# Altium PCB Balancing_Robot_1_2.PcbDoc (part 1 of 3)
Units mm, origin at the board's own origin, x right, y up, seen from the top; angles counter-clockwise.
Board outline 27 x 60 mm, 6 copper layers (Top Layer, Int1 (GND), Int2 (Sign), Int3 (Sign), Int4 (PWR), Bottom Layer), stack 1.571 mm thick; 139 components, 119 nets, 602 pads, 327 vias.
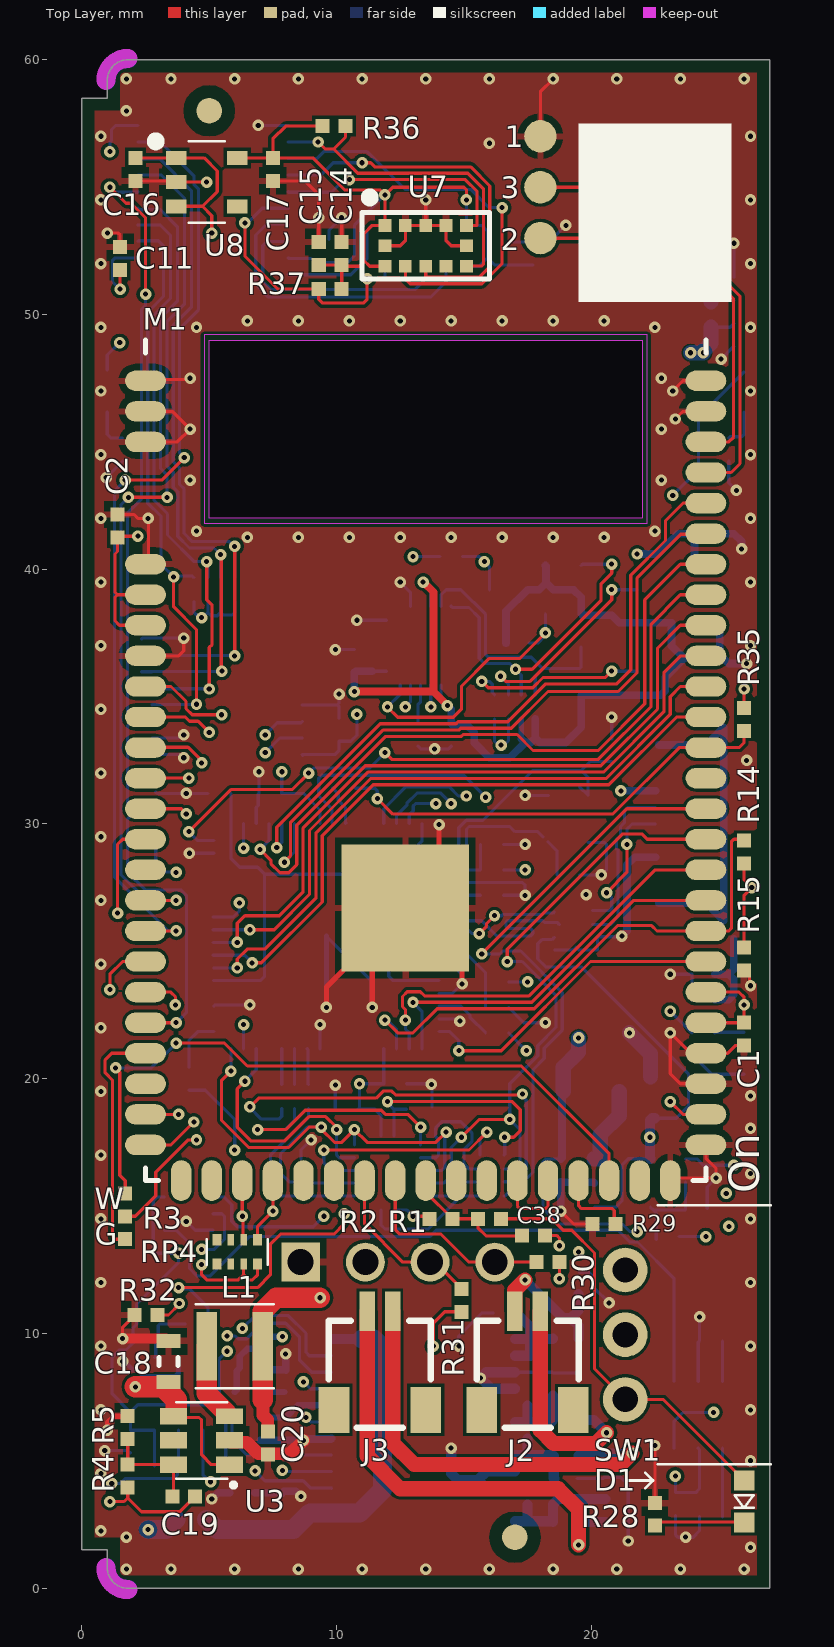
[diagram p0: Top Layer view]
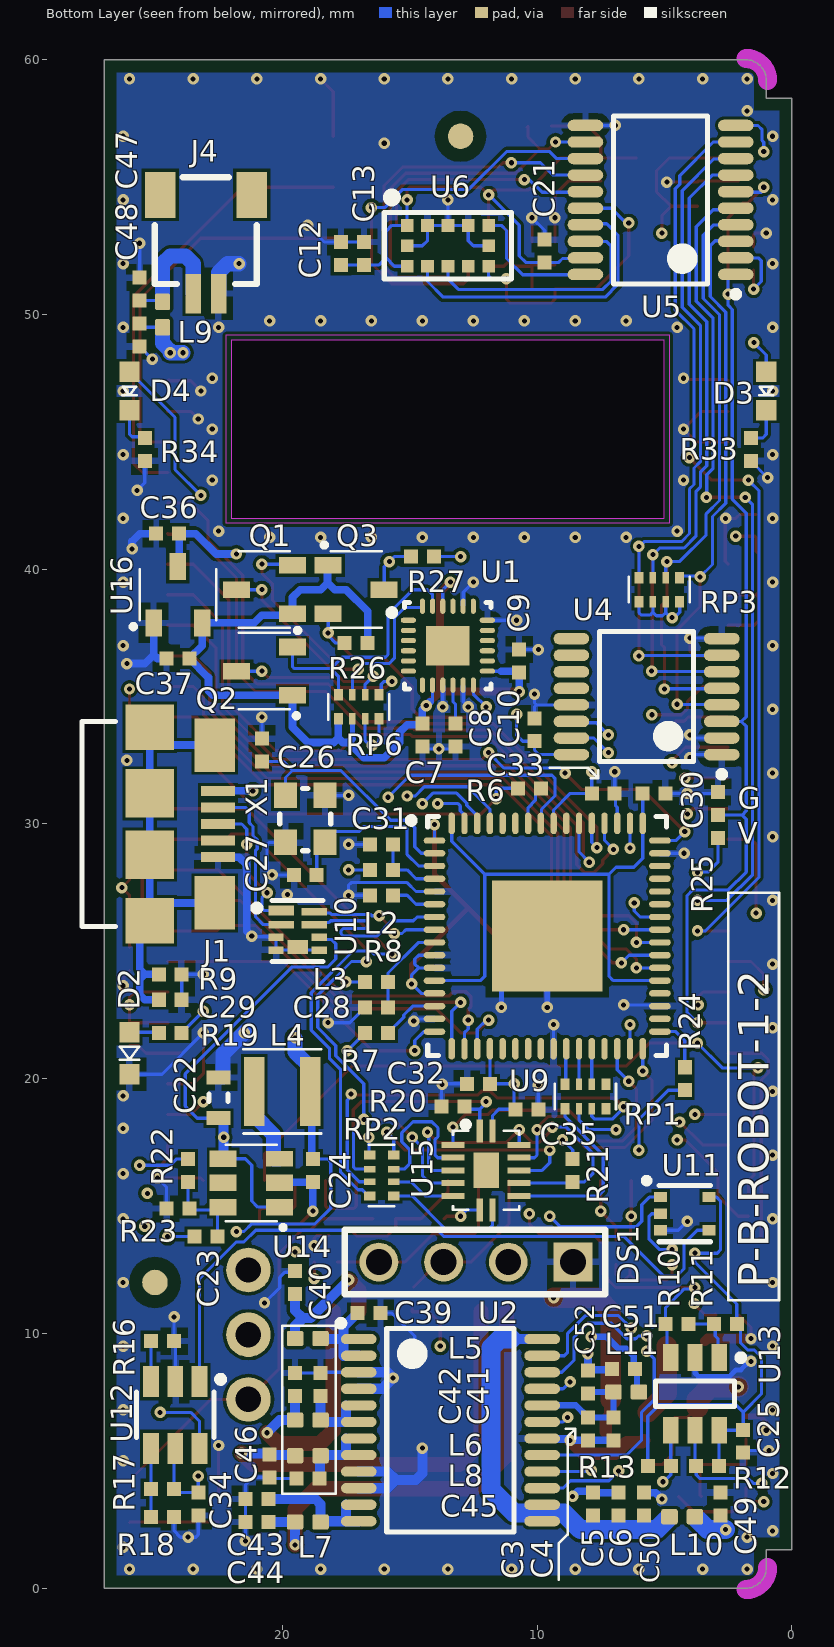
[diagram p1: Bottom Layer view, seen from below]
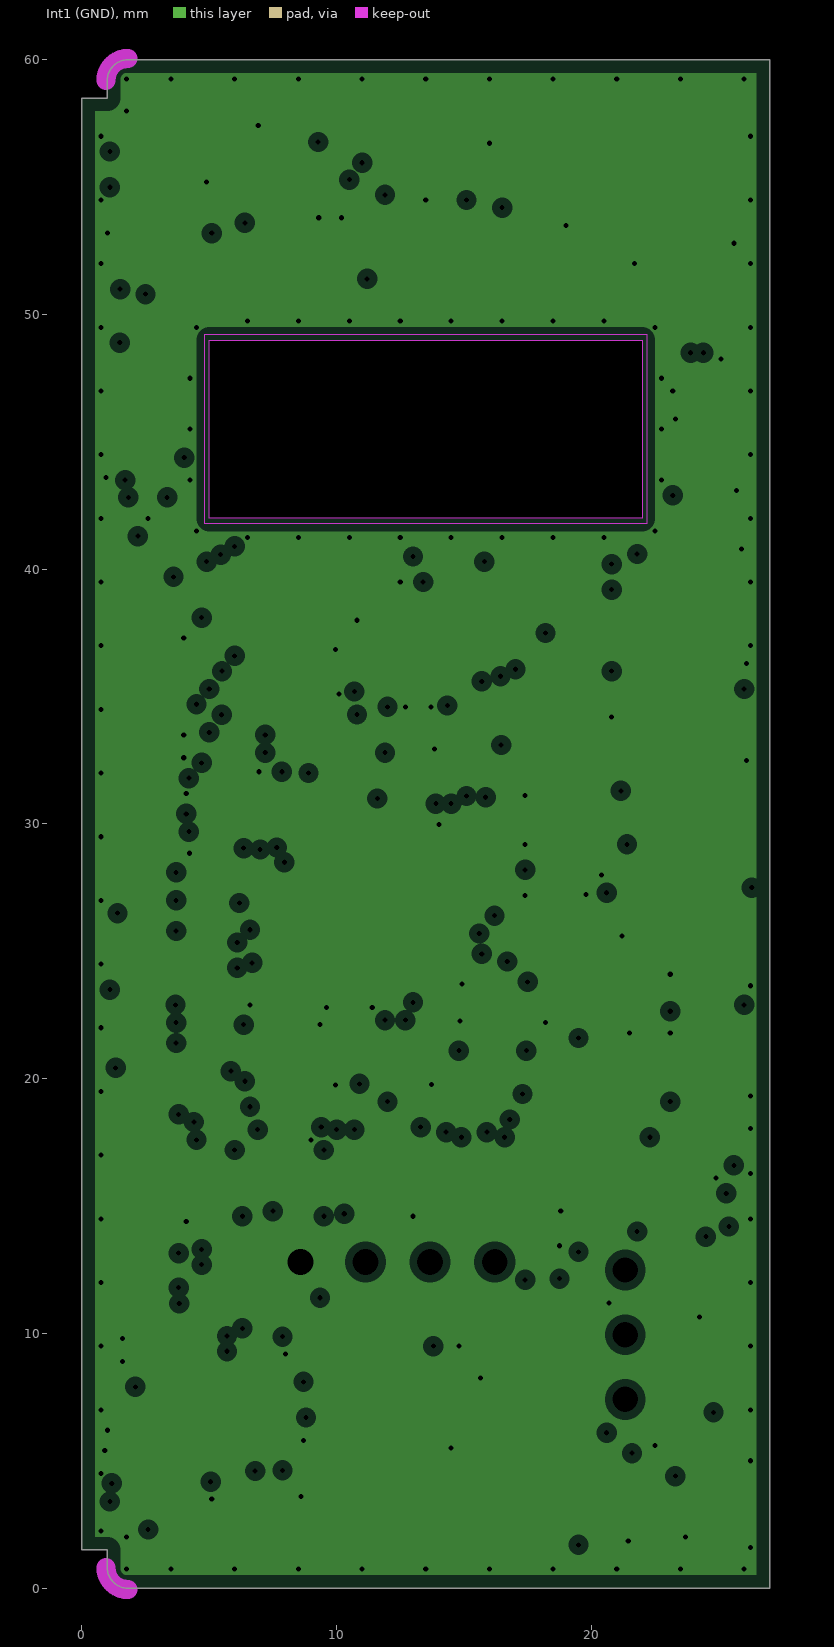
[diagram p2: Int1 (GND), clearances drawn from the general rule]
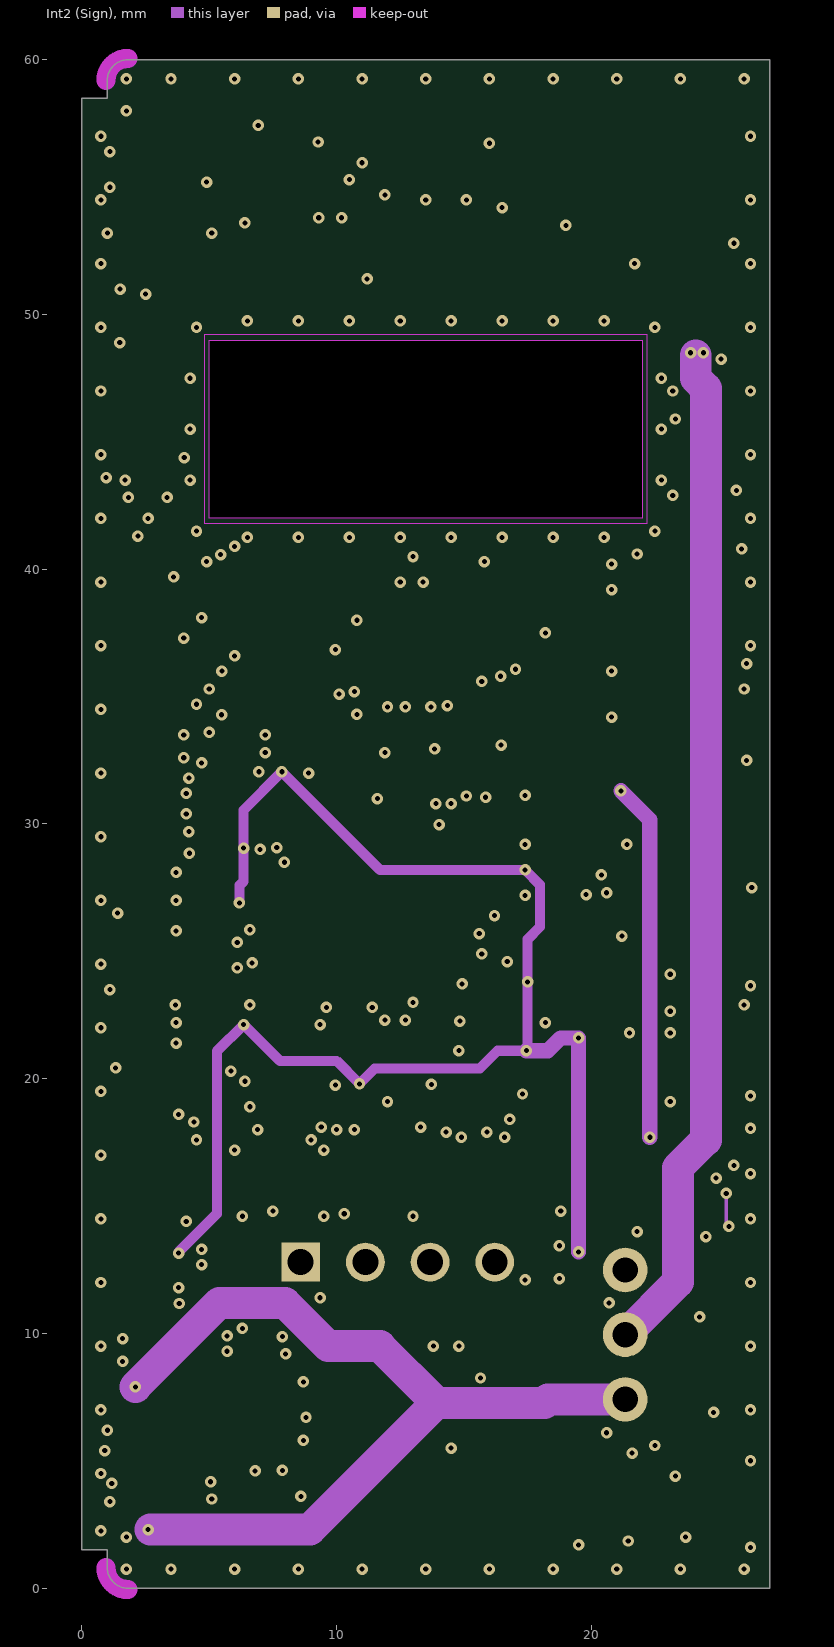
[diagram p3: Int2 (Sign)]
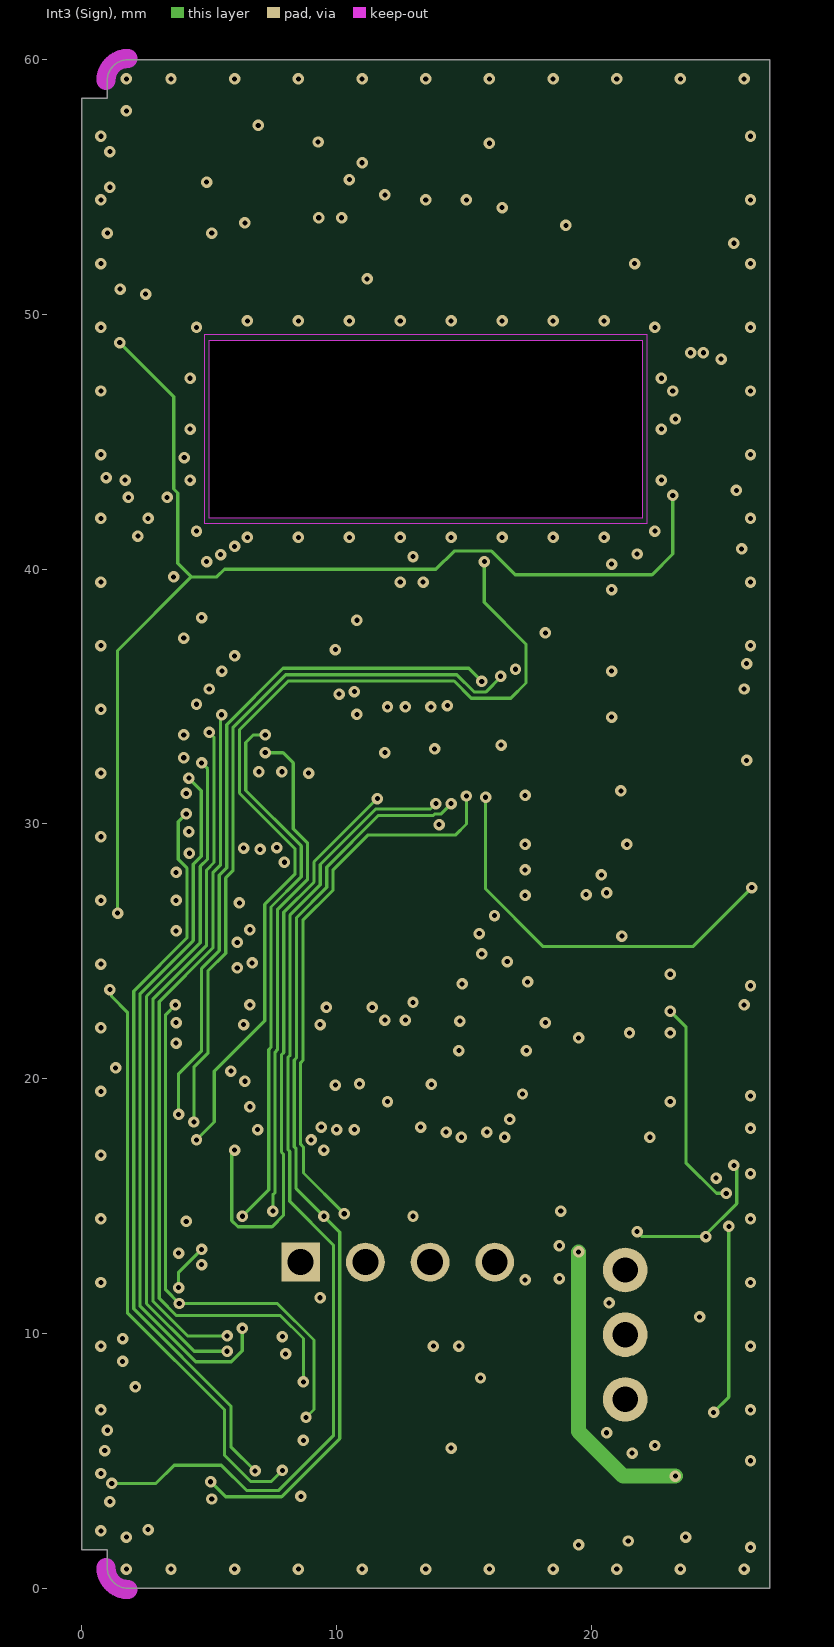
[diagram p4: Int3 (Sign)]
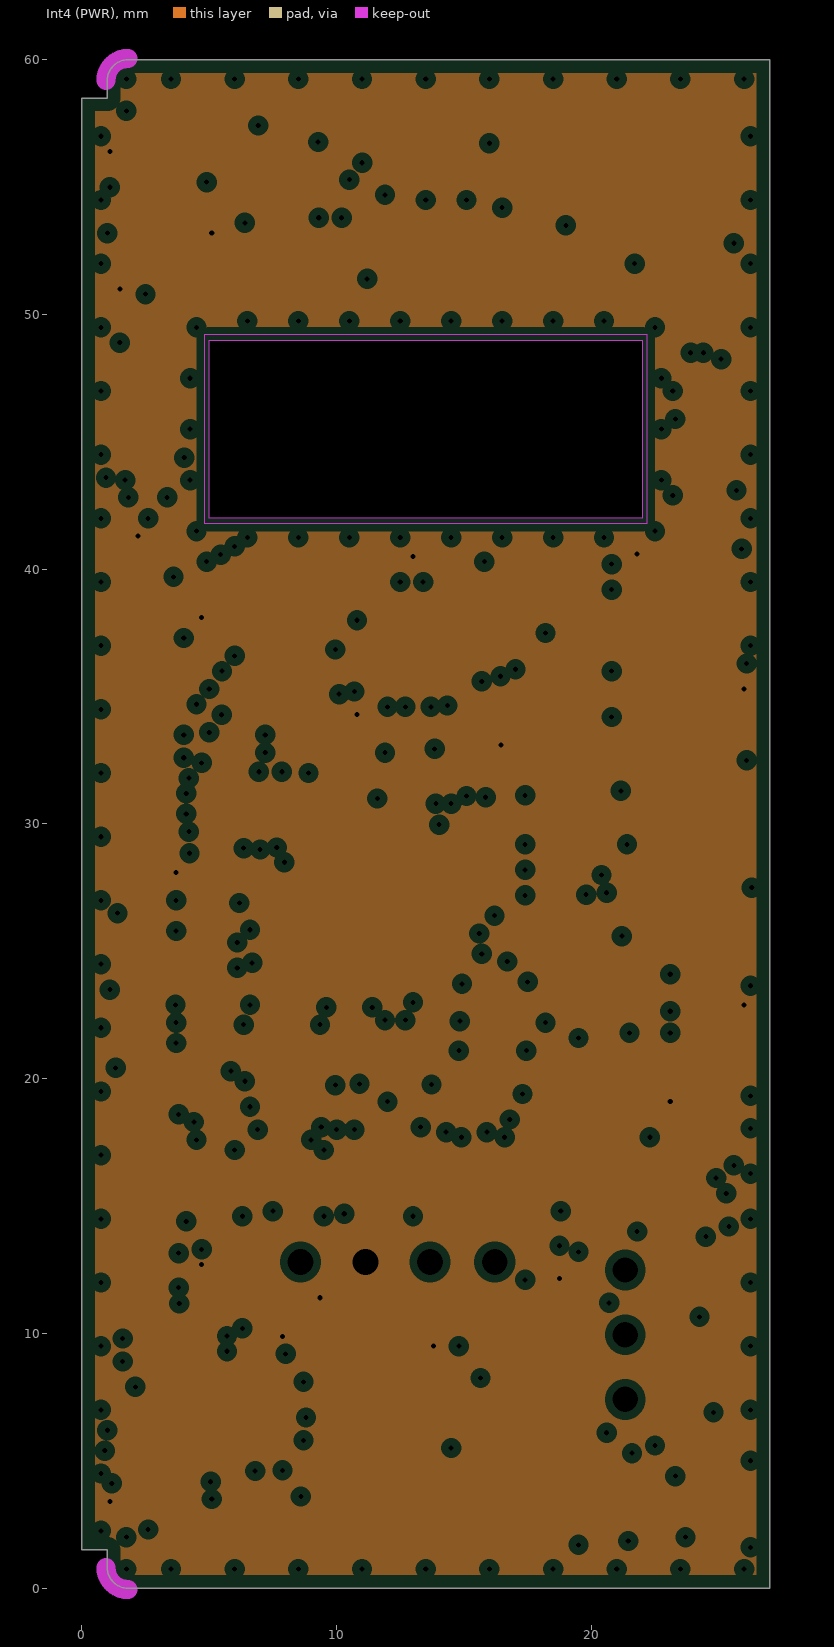
[diagram p5: Int4 (PWR), clearances drawn from the general rule]

## Layer stack, top to bottom
Top Solder: solder mask 0.0254, SM-001, Dk 4
Top Layer: signal copper 0.0044
Dielectric 1: prepreg 0.105, PP-006, Dk 4.1
Dielectric 2: prepreg 0.105, PP-006, Dk 4.1
Int1 (GND): plane copper 0.0044, net GND
Dielectric 3: core 0.4572, Core-035, Dk 4.7
Int2 (Sign): signal copper 0.0044
Dielectric 4: prepreg 0.105, PP-006, Dk 4.1
Dielectric 5: prepreg 0.105, PP-006, Dk 4.1
Int3 (Sign): signal copper 0.0044
Dielectric 6: core 0.4572, Core-035, Dk 4.7
Int4 (PWR): plane copper 0.0044, net 3V3
Dielectric 7: prepreg 0.105, PP-006, Dk 4.1
Dielectric 8: prepreg 0.105, PP-006, Dk 4.1
Bottom Layer: signal copper 0.0044
Bottom Solder: solder mask 0.0254, SM-001, Dk 4

## Board outline
0,1.5 1,1.5 1,0.8 ccw(c1.8,0.8) 1.8,0 27,0 27,60 1.8,60 ccw(c1.8,59.2) 1,59.2 1,58.5 0,58.5

## Design rules (kind name [scope] priority, off if disabled: settings)
Clearance Clearance_Fiducials [(IsPad) AND (Name = 'Free-1')] p1: gap=0.5 ignorepadtopadclearanceinfootprint=FALSE
Clearance [All] p2: gap=0.125 ignorepadtopadclearanceinfootprint=FALSE
DiffPairsRouting [All] p1: maxlimit=0.254 minlimit=0.125 mostfreqgap=0.125 toplayer_minwidth=0.125 toplayer_maxwidth=0.125 toplayer_prefwidth=0.125 midlayer1_minwidth=0.125 midlayer1_maxwidth=0.125 midlayer1_prefwidth=0.125 midlayer2_minwidth=0.125 midlayer2_maxwidth=0.125 midlayer2_prefwidth=0.125 bottomlayer_minwidth=0.125 bottomlayer_maxwidth=0.125 bottomlayer_prefwidth=0.125 maxuncoupledlength=12.7
HoleSize [All] p1: absolutevalues=TRUE maxlimit=4 minlimit=0.025 maxpercent=80.000 minpercent=20.000
MinimumSolderMaskSliver [All] p1: minsoldermaskwidth=0.01
PlaneClearance [All] p1: clearance=0.3
PlaneConnect PlaneConnect_IsVia [IsVia] p1: planeconnectstyle=Direct reliefexpansion=0.508 reliefentries=4 reliefconductorwidth=0.254 reliefairgap=0.254
PlaneConnect [All] p2: planeconnectstyle=Relief reliefexpansion=0.508 reliefentries=4 reliefconductorwidth=0.254 reliefairgap=0.254
PolygonConnect PolygonConnect_IsVia [IsVia] p1: connectstyle=Direct reliefconductorwidth=0.254 reliefentries=4 polygonreliefangle="90 Angle" airgapwidth=0.254
PolygonConnect [All] p2: connectstyle=Relief reliefconductorwidth=0.254 reliefentries=4 polygonreliefangle="90 Angle" airgapwidth=0.254
RoutingVias [All] p1: holewidth=0.2 width=0.45 viastyle="Through Hole" minholewidth=0.2 minwidth=0.45 maxholewidth=0.2 maxwidth=0.45
SilkToSilkClearance [All] p1: silktosilkclearance=0.01
SilkToSolderMaskClearance [IsPad] p1: minsilkscreentomaskgap=0.1 clearancetoexposedcopper=TRUE
SolderMaskExpansion [All] p1: expansion=0.102 istentingtop=FALSE
Width [All] p1: maxlimit=1.5 minlimit=0.125 preferedwidth=0.125
23 further rules are at their usual default settings.

## Classes and differential pairs
component class P-HEBRIDES-1-2_Sensors: C7 C8 C9 C10 C11 C12 C13 C14 C15 C16 C17 C21 C36 C37 Q1 Q2 Q3 R25 R26 R27 R36 R37 RP3 RP4 RP6 U1 U4 U5 U6 U7 U8 U16
component class P-HEBRIDES-1-2_Main: 1 2 3 C1 C2 C3 C4 C5 C6 C18 C19 C20 C38 C39 C40 C41 C42 C43 C44 C45 C46 C47 C48 C49 C50 C51 C52 D1 D3 D4 DS1 J2 J3 J4 L1 L5 L6 L7 L8 L9 L10 L11 M1 R1 R2 R3 R4 R5 R28 R29 R30 R31 R32 R33 R34 R35 SW1 U2 U3
component class P-HEBRIDES-1-2_FTDI: C22 C23 C24 C25 C26 C27 C28 C29 C30 C31 C32 C33 C34 C35 D2 J1 L2 L3 L4 R6 R7 R8 R9 R10 R11 R12 R13 R14 R15 R16 R17 R18 R19 R20 R21 R22 R23 R24 RP1 RP2 U9 U10 U11 U12 U13 U14 U15 X1
differential pair USB: +USB_P -USB_N
differential pair USB_F: +USB_F_P -USB_F_N

## Components (designator, comment, footprint, x,y, rotation, side; value= is the part's Value field where it differs from the comment)
1 "TestPoint" Pad1.27mm 18,57 r90 top
2 "TestPoint" Pad1.27mm 18,53 r90 top
3 "TestPoint" Pad1.27mm 18,55 r90 top
C1 "0.1µF" "CAPC1005-EIA0402 0.55MM MED" 26,21.75 r90 top
C2 "0.1µF" "CAPC1005-EIA0402 0.55MM MED" 1.4,41.7 r270 top
C3 "0.1µF" "CAPC1005-EIA0402 0.55MM MED" 8,6.25 r90 bottom
C4 "10µF" "CAPC1005-EIA0402 0.55MM MED" 7,6.25 r90 bottom
C5 "0.1µF" "CAPC1005-EIA0402 0.55MM MED" 7.8,3.3 r270 bottom
C6 "10µF" "CAPC1005-EIA0402 0.55MM MED" 6.8,3.3 r270 bottom
C7 "0.1µF" "CAPC1005-EIA0402 0.55MM MED" 14.5,33.5 r90 bottom
C8 "0.1µF" "CAPC1005-EIA0402 0.55MM MED" 13.2,33.5 r90 bottom
C9 "0.1µF" "CAPC1005-EIA0402 0.55MM MED" 10.7,36.4 r270 bottom
C10 "0.1µF" "CAPC1005-EIA0402 0.55MM MED" 10.1,33.7 r270 bottom
C11 "0.1µF" "CAPC1005-EIA0402 0.55MM MED" 1.5,52.2 r270 top
C12 "0.1µF" "CAPC1005-EIA0402 0.55MM MED" 17.7,52.4 r270 bottom
C13 "C1005X5R1A475K050BC" "CAPC1005-EIA0402 0.55MM MED" 16.8,52.4 r270 bottom
C14 "0.1µF" "CAPC1005-EIA0402 0.55MM MED" 10.2,52.4 r270 top
C15 "C1005X5R1A475K050BC" "CAPC1005-EIA0402 0.55MM MED" 9.3,52.4 r270 top
C16 "C1005X5R1V105K050BC" "CAPC1005-EIA0402 0.55MM MED" 2.1,55.7 r90 top
C17 "10µF" "CAPC1005-EIA0402 0.55MM MED" 7.5,55.7 r90 top
C18 "10µF" CAPC1608-EIA0603-1MM-MED 3.4,8.9 r270 top
C19 "33pF" "CAPC1005-EIA0402 0.55MM MED" 4,3.6 r0 top
C20 "10µF" "CAPC1005-EIA0402 0.55MM MED" 7.3,5.7 r90 top
C21 "0.1µF" "CAPC1005-EIA0402 0.55MM MED" 9.7,52.5 r270 bottom
C22 "10µF" CAPC1608-EIA0603-1MM-MED 22.5,19.25 r270 bottom
C23 "33pF" "CAPC1005-EIA0402 0.55MM MED" 23,13.8 r0 bottom
C24 "10µF" "CAPC1005-EIA0402 0.55MM MED" 18.8,16.4 r90 bottom
C25 "0.1µF" "CAPC1005-EIA0402 0.55MM MED" 1.906,5.766 r90 bottom
C26 "10pF" "CAPC1005-EIA0402 0.55MM MED" 20.8,32.9 r270 bottom
C27 "10pF" "CAPC1005-EIA0402 0.55MM MED" 19.1,28 r180 bottom
C28 "0.1µF" "CAPC1005-EIA0402 0.55MM MED" 16.3,22.8 r180 bottom
C29 "22pF" "CAPC1005-EIA0402 0.55MM MED" 24.4,23.1 r0 bottom
C30 "4.7µF" "CAPC1005-EIA0402 0.55MM MED" 5.4,31.2 r0 bottom
C31 "0.1µF" "CAPC1005-EIA0402 0.55MM MED" 16.1,29.2 r180 bottom
C32 "0.1µF" "CAPC1005-EIA0402 0.55MM MED" 12.3,19.8 r180 bottom
C33 "0.1µF" "CAPC1005-EIA0402 0.55MM MED" 7.4,31.2 r0 bottom
C34 "0.1µF" "CAPC1005-EIA0402 0.55MM MED" 23.3,3.3 r90 bottom
C35 "0.1µF" "CAPC1005-EIA0402 0.55MM MED" 10.4,18.8 r0 bottom
C36 "C1005X5R1V105K050BC" "CAPC1005-EIA0402 0.55MM MED" 24.5,41.4 r180 bottom
C37 "C1005X5R1V105K050BC" "CAPC1005-EIA0402 0.55MM MED" 24.1,36.5 r180 bottom
C38 "C1005X5R1V105K050BC" "CAPC1005-EIA0402 0.55MM MED" 17.725,13.85 r180 top
C39 "C1005X7R1H103K050BB" "CAPC1005-EIA0402 0.55MM MED" 16.6,10.8 r0 bottom
C40 "C1005X7R1H103K050BB" "CAPC1005-EIA0402 0.55MM MED" 19.5,12 r270 bottom
C41 "C1005X7R1H103K050BB" "CAPC1005-EIA0402 0.55MM MED" 18.5,8 r270 bottom
C42 "C1005X7R1H103K050BB" "CAPC1005-EIA0402 0.55MM MED" 19.5,8 r270 bottom
C43 "C1005X7R1H103K050BB" "CAPC1005-EIA0402 0.55MM MED" 21,3.5 r180 bottom
C44 "C1005X7R1H103K050BB" "CAPC1005-EIA0402 0.55MM MED" 21,2.6 r180 bottom
C45 "C1005X7R1H103K050BB" "CAPC1005-EIA0402 0.55MM MED" 19,4.3 r180 bottom
C46 "C1005X7R1H103K050BB" "CAPC1005-EIA0402 0.55MM MED" 20.5,4.8 r90 bottom
C47 "C1005X7R1H103K050BB" "CAPC1005-EIA0402 0.55MM MED" 25.6,51 r270 bottom
C48 "C1005X7R1H103K050BB" "CAPC1005-EIA0402 0.55MM MED" 25.6,49.2 r90 bottom
C49 "C1005X7R1H103K050BB" "CAPC1005-EIA0402 0.55MM MED" 2.8,3.3 r270 bottom
C50 "C1005X7R1H103K050BB" "CAPC1005-EIA0402 0.55MM MED" 5.8,3.3 r270 bottom
C51 "C1005X7R1H103K050BB" "CAPC1005-EIA0402 0.55MM MED" 6.6,8.6 r180 bottom
C52 "C1005X7R1H103K050BB" "CAPC1005-EIA0402 0.55MM MED" 8,8.1 r270 bottom
D1 "SML-D12D" "Rohm SML-D12 Orange" 26,3.4 r90 top
D2 "Green LED" "Rohm SML-D12 Green" 26,21 r90 bottom
D3 "LTW-C191TS5" LTW-C191TS5 1,47 r90 bottom
D4 "LTW-C191TS5" LTW-C191TS5 26,47 r90 bottom
DS1 "V081314V9HITS1YZ" Long_Display 12.4,12.8 r0 bottom locked
J1 "Amphenol FCI 10118192-0001LF" FCI-10118192-0001LF-5_V 25.2,30 r270 bottom locked
J2 "SM02B-SRSS-TB(LF)(SN)" SM02B-SRSS-TB 17.5,7.9 r0 top
J3 "SM02B-SRSS-TB(LF)(SN)" SM02B-SRSS-TB 11.7,7.9 r0 top
J4 "SM02B-SRSS-TB(LF)(SN)" SM02B-SRSS-TB 23,53.8 r0 bottom locked
L1 "2.2µH" NR3015T2R2M 6,9.5 r0 top
L2 "FERRITE BEAD" "CAPC1005-EIA0402 0.55MM MED" 16.1,28.2 r0 bottom
L3 "FERRITE BEAD" "CAPC1005-EIA0402 0.55MM MED" 16.3,23.8 r0 bottom
L4 "2.2µH" NR3015T2R2M 20,19.5 r180 bottom
L5 "BLM15PX471SN1D" "Generic Ferrite 0402" 19,9.8 r0 bottom
L6 "BLM15PX471SN1D" "Generic Ferrite 0402" 19,6.6 r0 bottom
L7 "BLM15PX471SN1D" "Generic Ferrite 0402" 19,2.6 r0 bottom
L8 "BLM15PX471SN1D" "Generic Ferrite 0402" 19,5.2 r0 bottom
L9 "BLM15PX471SN1D" "Generic Ferrite 0402" 24.7,50 r270 bottom
L10 "BLM15PX471SN1D" "Generic Ferrite 0402" 4.3,2.8 r0 bottom
L11 "BLM15PX471SN1D" "Generic Ferrite 0402" 6.5,7.7 r0 bottom
M1 "AES-MS-MT3620-M-G" AES-MS-MT3620-M-G 2.5,16 r0 top locked
Q1 "BSS138" TOREX-SOT23-3 20.7,39.2 r90 bottom
Q2 "BSS138" TOREX-SOT23-3 20.7,36 r90 bottom
Q3 "BSS138" TOREX-SOT23-3 17.1,39.2 r270 bottom
R1 "100K" "RES 0402 MEDIUM DENSITY" 16,14.5 r180 top
R2 "100K" "RES 0402 MEDIUM DENSITY" 14.1,14.5 r180 top
R3 "0R" THREE-WAY-0402-NO-SHORT 1.7,15.05 r270 top
R4 "150K" "RES 0402 MEDIUM DENSITY" 1.8,4.4 r90 top
R5 "33.2K" "RES 0402 MEDIUM DENSITY" 1.8,6.3 r90 top
R6 "4K7" "RES 0402 MEDIUM DENSITY" 10.3,31.4 r0 bottom
R7 "10K" "RES 0402 MEDIUM DENSITY" 16.3,21.8 r180 bottom
R8 "12K" "RES 0402 MEDIUM DENSITY" 16.1,27.2 r0 bottom
R9 "1M" "RES 0402 MEDIUM DENSITY" 24.4,24.1 r180 bottom
R10 "2.2K" "RES 0402 MEDIUM DENSITY" 4.506,10.366 r0 bottom
R11 "10K" "RES 0402 MEDIUM DENSITY" 2.606,10.366 r0 bottom
R12 "10K" "RES 0402 MEDIUM DENSITY" 3.3,4.8 r0 bottom
R13 "10K" "RES 0402 MEDIUM DENSITY" 5.2,4.8 r180 bottom
R14 "2.2K" "RES 0402 MEDIUM DENSITY" 26,28.9 r270 top
R15 "2.2K" "RES 0402 MEDIUM DENSITY" 26,24.7 r270 top
R16 "154K" "RES 0402 MEDIUM DENSITY" 24.7,9.7 r180 bottom
R17 "1M" "RES 0402 MEDIUM DENSITY" 24.7,3.9 r0 bottom
R18 "523K" "RES 0402 MEDIUM DENSITY" 24.7,2.8 r180 bottom
R19 "100R" "RES 0402 MEDIUM DENSITY" 24.4,21.8 r0 bottom
R20 "4K7" "RES 0402 MEDIUM DENSITY" 13.3,18.9 r0 bottom
R21 "4K7" "RES 0402 MEDIUM DENSITY" 8.6,16.4 r90 bottom
R22 "150K" "RES 0402 MEDIUM DENSITY" 23.7,16.4 r270 bottom
R23 "33.2K" "RES 0402 MEDIUM DENSITY" 24.1,14.9 r0 bottom
R24 "4K7" "RES 0402 MEDIUM DENSITY" 4.2,20 r270 bottom
R25 "4.7K" THREE-WAY-0402-NO-SHORT 2.9,30.8 r270 bottom
R26 "2.2K" "RES 0402 MEDIUM DENSITY" 17.1,37.1 r0 bottom
R27 "2.2K" "RES 0402 MEDIUM DENSITY" 14.5,40.5 r0 bottom
R28 "330R" "RES 0402 MEDIUM DENSITY" 22.5,2.9 r90 top
R29 "4.7K" "RES 0402 MEDIUM DENSITY" 20.5,14.3 r180 top
R30 "2.2K" "RES 0402 MEDIUM DENSITY" 18.3,12.8 r180 top
R31 "2.2K" "RES 0402 MEDIUM DENSITY" 14.9,11.3 r90 top
R32 "4.7K" "RES 0402 MEDIUM DENSITY" 2.525,10.725 r180 top
R33 "330R" "RES 0402 MEDIUM DENSITY" 1.6,44.7 r270 bottom
R34 "330R" "RES 0402 MEDIUM DENSITY" 25.4,44.7 r270 bottom
R35 "100K" "RES 0402 MEDIUM DENSITY" 26,34.1 r270 top
R36 "10K" "RES 0402 MEDIUM DENSITY" 9.9,57.4 r0 top
R37 "10K" "RES 0402 MEDIUM DENSITY" 9.75,51 r180 top
RP1 "51R" EXB-N8V 8.1,19.3 r180 bottom locked
RP2 "51R" EXB-N8V 16.1,16.2 r90 bottom
RP3 "4K7" EXB-N8V 5.2,39.2 r0 bottom
RP4 "2K2" EXB-N8V 6.1,13.2 r180 top
RP6 "2K2" EXB-N8V 17,34.6 r0 bottom
SW1 "CL-SA-12C4-02" CL-SA-12C4-02 24.76,9.95 r90 top locked
U1 "ICM-20948" ICM_20948 13.5,37 r180 bottom locked
U2 "TB6612FNG" TB6612FNG 13.4,6.2 r180 bottom locked
U3 "TLV62569DBVR" TI-SOT23-6 4.7,5.8 r90 top
U4 "PCA9546APWR" PCA9546APWR 5.7,35 r0 bottom locked
U5 "TXS0108EPWR" TXS0108EPWR 5.15,54.5 r0 bottom locked
U6 "VL53L1CXV0FY/1" VL53L1X 13.5,52.7 r180 bottom locked
U7 "VL53L1CXV0FY/1" VL53L1X 13.5,52.7 r0 top locked
U8 "XC6222B281MR-G" SOT25 4.9,55.2 r270 top
U9 "FT4232HQ" FTDI_TF4232HQ_64QFN 9.6,25.6 r180 bottom locked
U10 "EMI2121MTTAG" EMI2121MTTAG 19.4,25.8 r270 bottom
U11 "NC7SZ08P5X" SC-70-5 4.2,14.7 r270 bottom
U12 "LTC6993CS6-2#TRMPBF" LTC6993CS6-2#TRMPBF 24.2,6.8 r0 bottom
U13 "93LC56BT-I/OT" SOT23-93C56B 3.8,7.625 r270 bottom locked
U14 "TLV62569DBVR" TI-SOT23-6 21.22,15.908 r90 bottom
U15 "74LCX126BQX" 74LCX126BQX 12,16.4 r270 bottom locked
U16 "XC6206P182MR" TOREX-SOT23-3 24.1,39 r180 bottom
X1 "12MHz" "TXC 8Z" 19.1,30.2 r90 bottom

## Footprints (in the part's own frame and the unit in brackets; to place one, negate y for a bottom-side part, rotate by r counter-clockwise, add the part's x,y. Pads: shape width x height; smd on the part's side, far side on the other; paste and mask are expansions set on the pad)
74LCX126BQX [mm] "Quad buffer"
  rect 1.4x1 smd: 0(0,0)
  rect 0.9x0.24 smd: 1(-1.55,-0.25) 7(1.55,-0.25) 8(1.55,0.25) 14(-1.55,0.25)
  rect 0.24x0.9 smd: 2(-1,-1.3) 3(-0.5,-1.3) 4(0,-1.3) 5(0.5,-1.3) 6(1,-1.3) 9(1,1.3) 10(0.5,1.3) 11(0,1.3) 12(-0.5,1.3) 13(-1,1.3)
  silkscreen extent -1.92,-1.3 1.55,1.3, body extent -2.1,-1.85 2.1,1.85, height 1.27
AES-MS-MT3620-M-G [mm]
  rrect100% 1.6x0.8 smd: 1(0,24.2) 2(0,23) 3(0,21.8) 4(0,20.6) 5(0,19.4) 6(0,18.2) 7(0,17) 8(0,15.8) 9(0,14.6) 10(0,13.4) 11(0,12.2) 12(0,11) 13(0,9.8) 14(0,8.6) 15(0,7.4) 16(0,6.2) 17(0,5) 18(0,3.8) 19(0,2.6) 20(0,1.4) 38(22,1.4) 39(22,2.6) 40(22,3.8) 41(22,5) 42(22,6.2) 43(22,7.4) 44(22,8.6) 45(22,9.8) 46(22,11) 47(22,12.2) 48(22,13.4) 49(22,14.6) 50(22,15.8) 51(22,17) 52(22,18.2) 53(22,19.4) 54(22,20.6) 55(22,21.8) 56(22,23) 57(22,24.2) 58(22,25.4) 59(22,26.6) 60(22,27.8) 61(22,29) 62(22,30.2) 63(22,31.4) 64(0,29) 65(0,30.2) 66(0,31.4)
  rrect100% 0.8x1.6 smd: 21(1.4,0) 22(2.6,0) 23(3.8,0) 24(5,0) 25(6.2,0) 26(7.4,0) 27(8.6,0) 28(9.8,0) 29(11,0) 30(12.2,0) 31(13.4,0) 32(14.6,0) 33(15.8,0) 34(17,0) 35(18.2,0) 36(19.4,0) 37(20.6,0)
  rect 5x5 smd paste-1: 67(10.2,10.7)
  Keep-Out Layer board cut-out: 2.5,33 2.5,33 19.5,33 19.5,26 19.5,26 2.5,26
  silkscreen extent 0,0 22,33, body extent -0.9,-0.9 22.9,33.1, height 1.27
"CAPC1005-EIA0402 0.55MM MED" [mm] "Chip Capacitor 1.0mm x 0.5mm, IPC Medium Density"
  rect 0.55x0.55 smd: 1(-0.45,0) 2(0.45,0)
  body extent -0.92,-0.47 0.93,0.48, height 1.27
CAPC1608-EIA0603-1MM-MED [mm] "Chip Capacitor, 2-Leads, Body 1.60x0.80mm, IPC Medium Density"
  rect 0.55x0.95 smd: 1(-0.8,0) 2(0.8,0)
  silkscreen extent -0.15,-0.38 0.15,0.38, body extent -1.37,-0.77 1.38,0.78, height 1.27
CL-SA-12C4-02 [mm]
  round 1.75 hole 1: 1(0,3.429) 2(2.54,3.429) 3(-2.54,3.429)
  silkscreen extent -5.08,-2.29 5.08,2.16, body extent -5.13,-3.74 5.13,4.49, height 1.27
EMI2121MTTAG [mm]
  rect 0.4x1 smd paste-0.03: 1(-0.8,-0.65)
  rect 0.3x1 smd paste-0.03: 2(-0.25,-0.65) 7(-0.25,0.65) 8(-0.75,0.65)
  rect 0.3x0.6 smd paste-0.03: 3(0.25,-0.85) 4(0.75,-0.85) 5(0.75,0.85) 6(0.25,0.85)
  rect 0.54x0.8 smd paste-0.08: 9(0.63,0)
  silkscreen extent -1.2,-1.73 1.2,1, body extent -1.3,-1.86 1.3,1.25, height 1.27
EXB-N8V [mm] "Resistor array 0804"
  rect 0.35x0.45 smd: 1(-0.8,-0.475) 2(-0.8,0.475) 7(0.8,-0.475) 8(0.8,0.475)
  rect 0.25x0.45 smd: 3(-0.25,-0.475) 4(-0.25,0.475) 5(0.25,-0.475) 6(0.25,0.475)
  Top Layer pour cut-out: -0.975,0.7 0.975,0.7 0.975,-0.7 -0.975,-0.7
  silkscreen extent -1.2,-0.5 1.2,0.5, body extent -1.25,-0.85 1.25,0.85, height 1.27
FCI-10118192-0001LF-5_V [mm] "SMD, 5-Leads, Body 8.05x5.77mm, Pitch 0.65mm"
  rect 0.4x1.35 smd: 1(-1.3,2.675) 2(-0.65,2.675) 3(0,2.675) 4(0.65,2.675) 5(1.3,2.675)
  rect 2.1x1.6 smd: 6(-3.1,2.55) 7(3.1,2.55)
  rect 1.8x1.9 smd: 8(-3.8,0) 9(3.8,0)
  rect 1.9x1.9 smd: 10(-1.2,0) 11(1.2,0)
  silkscreen extent -4.03,-2.67 4.03,-1.35, body extent -6.05,-2.8 6.05,3.47, height 1.27
FTDI_TF4232HQ_64QFN [mm] "QFN, 64-Leads, Body 9.00x9.00mm, Pitch 0.50mm, Thermal Pad 4.35x4.35mm, IPC Medium Density"
  oval 0.85x0.25 smd: 1(-4.425,3.75) 2(-4.425,3.25) 3(-4.425,2.75) 4(-4.425,2.25) 5(-4.425,1.75) 6(-4.425,1.25) 7(-4.425,0.75) 8(-4.425,0.25) 9(-4.425,-0.25) 10(-4.425,-0.75) 11(-4.425,-1.25) 12(-4.425,-1.75) 13(-4.425,-2.25) 14(-4.425,-2.75) 15(-4.425,-3.25) 16(-4.425,-3.75) 33(4.425,-3.75) 34(4.425,-3.25) 35(4.425,-2.75) 36(4.425,-2.25) 37(4.425,-1.75) 38(4.425,-1.25) 39(4.425,-0.75) 40(4.425,-0.25) 41(4.425,0.25) 42(4.425,0.75) 43(4.425,1.25) 44(4.425,1.75) 45(4.425,2.25) 46(4.425,2.75) 47(4.425,3.25) 48(4.425,3.75)
  oval 0.25x0.85 smd: 17(-3.75,-4.425) 18(-3.25,-4.425) 19(-2.75,-4.425) 20(-2.25,-4.425) 21(-1.75,-4.425) 22(-1.25,-4.425) 23(-0.75,-4.425) 24(-0.25,-4.425) 25(0.25,-4.425) 26(0.75,-4.425) 27(1.25,-4.425) 28(1.75,-4.425) 29(2.25,-4.425) 30(2.75,-4.425) 31(3.25,-4.425) 32(3.75,-4.425) 49(3.75,4.425) 50(3.25,4.425) 51(2.75,4.425) 52(2.25,4.425) 53(1.75,4.425) 54(1.25,4.425) 55(0.75,4.425) 56(0.25,4.425) 57(-0.25,4.425) 58(-0.75,4.425) 59(-1.25,4.425) 60(-1.75,4.425) 61(-2.25,4.425) 62(-2.75,4.425) 63(-3.25,4.425) 64(-3.75,4.425)
  rect 4.35x4.35 smd paste-0.5: 65(0,0)
  silkscreen extent -5.47,-4.69 4.69,4.69, body extent -5.59,-5.13 5.13,5.12, height 1.27
"Generic Ferrite 0402" [mm] "Ferrite bead 0402"
  rrect25% 0.65x0.6 smd: 1(-0.5,0) 2(0.5,0)
  body extent -0.97,-0.53 0.98,0.52, height 1.27
ICM_20948 [mm] "QFN, 24-Leads, Body 3.00x3.00mm, Pitch 0.40mm, Thermal Pad 1.70x1.54mm, IPC Medium Density"
  oval 0.6x0.2 smd: 1(-1.55,1) 2(-1.55,0.6) 3(-1.55,0.2) 4(-1.55,-0.2) 5(-1.55,-0.6) 6(-1.55,-1) 13(1.55,-1) 14(1.55,-0.6) 15(1.55,-0.2) 16(1.55,0.2) 17(1.55,0.6) 18(1.55,1)
  oval 0.2x0.6 smd: 7(-1,-1.55) 8(-0.6,-1.55) 9(-0.2,-1.55) 10(0.2,-1.55) 11(0.6,-1.55) 12(1,-1.55) 19(1,1.55) 20(0.6,1.55) 21(0.2,1.55) 22(-0.2,1.55) 23(-0.6,1.55) 24(-1,1.55)
  rect 1.7x1.54 smd paste-0.25: 25(0,0)
  silkscreen extent -2.32,-1.7 1.7,1.7, body extent -2.45,-2.13 2.13,2.12, height 1.27
Long_Display [mil]
  rect 60x60 hole 40: 1(-150,0)
  round 60 hole 40: 2(-50,0) 3(50,0) 4(150,0)
  silkscreen extent -200,-50 203,50, body extent -205,-55 208,55, height 50
LTC6993CS6-2#TRMPBF [mm]
  rect 0.62x1.22 smd: 1(-0.95,-1.31) 2(0,-1.31) 3(0.95,-1.31) 4(0.95,1.31) 5(0,1.31) 6(-0.95,1.31)
  silkscreen extent -1.9,-1.52 1.52,0.89, body extent -2.03,-2.02 1.62,2.02, height 1.27
LTW-C191TS5 [mm]
  rect 0.8x0.8 smd: 1(-0.75,0) 2(0.75,0)
  silkscreen extent -0.18,-0.28 0.18,0.27, body extent -1.35,-0.6 1.35,0.6, height 1.27
NR3015T2R2M [mm]
  rect 0.8x2.7 smd: 1(-1.1,0) 2(1.1,0)
  silkscreen extent -1.52,-1.65 1.52,1.65, body extent -1.68,-1.7 1.68,1.7, height 1.27
Pad1.27mm [mm] "1.27mm dia round pad"
  round 1.27 smd paste-2.54: 1(0,0)
  body extent -0.74,-0.74 0.74,0.74, height 1.27
PCA9546APWR [mm] "TSOP, 16-Leads, Body 5.00x4.40mm, Pitch 0.65mm, IPC Medium Density"
  oval 1.4x0.45 smd: 1(-2.95,2.275) 2(-2.95,1.625) 3(-2.95,0.975) 4(-2.95,0.325) 5(-2.95,-0.325) 6(-2.95,-0.975) 7(-2.95,-1.625) 8(-2.95,-2.275) 9(2.95,-2.275) 10(2.95,-1.625) 11(2.95,-0.975) 12(2.95,-0.325) 13(2.95,0.325) 14(2.95,0.975) 15(2.95,1.625) 16(2.95,2.275)
  silkscreen extent -3.07,-2.55 1.85,3.17, body extent -3.92,-2.83 3.93,3.3, height 1.27
"RES 0402 MEDIUM DENSITY" [mm] "Panasonic ERJR 0402"
  rect 0.55x0.55 smd: 1(-0.45,0) 2(0.45,0)
  body extent -0.92,-0.47 0.93,0.48, height 1.27
"Rohm SML-D12 Green" [mm]
  rect 0.8x0.8 smd paste-0.05: 1(-0.825,0) 2(0.825,0)
  silkscreen extent -0.25,-0.38 0.25,0.38, body extent -1.43,-0.6 1.43,0.6, height 1.27
"Rohm SML-D12 Orange" [mm]
  rect 0.8x0.8 smd paste-0.05: 1(-0.825,0) 2(0.825,0)
  silkscreen extent -0.25,-0.38 0.25,0.38, body extent -1.43,-0.6 1.43,0.6, height 1.27
SC-70-5 [mm]
  rect 0.4x0.5 smd: 1(-0.65,-0.95) 2(0,-0.95) 3(0.65,-0.95) 4(0.65,0.95) 5(-0.65,0.95)
  silkscreen extent -1.4,-1.6 1.1,1, body extent -1.53,-1.73 1.2,1.3, height 1.27
SM02B-SRSS-TB [mm] "2 Terminal SMB connector"
  rect 0.6x1.55 smd: 1(-0.5,2.975) 2(0.5,2.975)
  rect 1.2x1.8 smd: ""(-1.8,-0.9) ""(1.8,-0.9)
  silkscreen extent -2,-1.6 2,2.6, body extent -2.5,-1.9 2.5,3.85, height 1.27
SOT23-93C56B [mm] "SOT23, 6-Leads, Body 2.90x2.70mm, Pitch 0.95mm, IPC Medium Density"
  rect 1.05x0.6 smd: 1(-1.425,0.95) 2(-1.425,0) 3(-1.425,-0.95) 4(1.425,-0.95) 5(1.425,0) 6(1.425,0.95)
  silkscreen extent -1.55,-1.55 0.5,1.92, body extent -2.12,-1.73 2.13,2.05, height 1.27
SOT25 [mm]
  rect 0.55x0.8 smd: 1(-0.95,-1.2) 2(0,-1.2) 3(0.95,-1.2) 4(0.95,1.2) 5(-0.95,1.2)
  silkscreen extent -1.7,-2.1 1.6,0.7, body extent -1.95,-2.35 1.65,1.7, height 1.27
TB6612FNG [mm] "TSOP, 24-Leads, Body 7.80x5.60mm, Pitch 0.65mm, IPC Medium Density"
  oval 1.4x0.4 smd: 1(-3.6,3.575) 2(-3.6,2.925) 3(-3.6,2.275) 4(-3.6,1.625) 5(-3.6,0.975) 6(-3.6,0.325) 7(-3.6,-0.325) 8(-3.6,-0.975) 9(-3.6,-1.625) 10(-3.6,-2.275) 11(-3.6,-2.925) 12(-3.6,-3.575) 13(3.6,-3.575) 14(3.6,-2.925) 15(3.6,-2.275) 16(3.6,-1.625) 17(3.6,-0.975) 18(3.6,-0.325) 19(3.6,0.325) 20(3.6,0.975) 21(3.6,1.625) 22(3.6,2.275) 23(3.6,2.925) 24(3.6,3.575)
  silkscreen extent -4.42,-4 2.5,4.32, body extent -4.57,-4.28 4.57,4.45, height 1.27
THREE-WAY-0402-NO-SHORT [mm]
  rect 0.55x0.55 smd: 1(-0.45,0) 2(0.45,0)
  rect 0.55x0.55 smd paste-1: 3(1.35,0)
  body extent -0.83,-0.4 1.73,0.4, height 1.27
TI-SOT23-6 [mm]
  rect 0.65x1.06 smd: 1(-0.95,-1.1) 2(0,-1.1) 4(0.95,1.1) 5(0,1.1) 6(-0.95,1.1)
  rect 0.6x1.06 smd: 3(0.95,-1.1)
  silkscreen extent -1.81,-1.31 1.5,1, body extent -1.93,-1.77 1.58,1.78, height 1.27
TOREX-SOT23-3 [mm]
  rect 0.65x1.06 smd: 1(-0.95,-1.1) 2(0.95,-1.1) 3(0,1.1)
  silkscreen extent -1.66,-1.36 1.5,1, body extent -1.78,-1.78 1.58,1.77, height 1.27
"TXC 8Z" [mm] "2.5x2.0mm SMD xtal"
  rect 1x0.9 smd: 1(-0.925,-0.775) 2(0.925,-0.775) 3(0.925,0.775) 4(-0.925,0.775)
  silkscreen extent -1.25,-1 1.2,1, body extent -1.53,-1.33 1.53,1.33, height 1.27
TXS0108EPWR [mm] "TSOP, 20-Leads, Body 6.50x4.40mm, Pitch 0.65mm, IPC Medium Density"
  oval 1.4x0.45 smd: 1(-2.95,2.925) 2(-2.95,2.275) 3(-2.95,1.625) 4(-2.95,0.975) 5(-2.95,0.325) 6(-2.95,-0.325) 7(-2.95,-0.975) 8(-2.95,-1.625) 9(-2.95,-2.275) 10(-2.95,-2.925) 11(2.95,-2.925) 12(2.95,-2.275) 13(2.95,-1.625) 14(2.95,-0.975) 15(2.95,-0.325) 16(2.95,0.325) 17(2.95,0.975) 18(2.95,1.625) 19(2.95,2.275) 20(2.95,2.925)
  silkscreen extent -3.07,-3.3 1.85,3.82, body extent -3.92,-3.58 3.93,3.95, height 1.27
VL53L1X [mm]
  rect 0.5x0.5 smd: 1(-1.6,0.8) 2(-0.8,0.8) 3(0,0.8) 4(0.8,0.8) 5(1.6,0.8) 6(1.6,0) 7(1.6,-0.8) 8(0.8,-0.8) 9(0,-0.8) 10(-0.8,-0.8) 11(-1.6,-0.8) 12(-1.6,0)
  silkscreen extent -2.5,-1.3 2.5,2, body extent -2.6,-1.4 2.6,2.25, height 1.27

## Part data
1 2 3: "Test Point"
C1 C2 C3 C5 C7 C8 C9 C10 C11 C12 C14 C21 C25 C28 C31 C32 C33 C34 C35: library part "0.1µF 0402 X7R 50V", "CAP CER 0.1UF 50V 10% X7R 0402", Manufacturer="TDK Corporation", Manufacturer Part Number=C1005X7R1H104K050BB, Operating Temperature="-55°C ~ 125°C", Package / Case="0402 (1005 Metric)", Ratings=-, Supplier Part Number 1=445-5932-2-ND, Temperature Coefficient=X7R, Tolerance=±10%, Voltage - Rated=50V, Applications="General Purpose", Capacitance=0.1µF, Category=Capacitors, ComponentLink1Description=http://product.tdk.com/en/catalog/datasheets/mlcc_commercial_general_en.pdf, ComponentLink1URL=http://product.tdk.com/en/catalog/datasheets/mlcc_commercial_general_en.pdf, Features=-, Height - Seated (Max)=-, Lead Spacing=-, Lead Style=-, Mounting Type="Surface Mount, MLCC", Packaging="Tape & Reel (TR)", Pricing 1=0.01305, RoHS="RoHS Compliant", Size / Dimension="0.039\" L x 0.020\" W (1.00mm x 0.50mm)", Stock 1=47833, Supplier 1=Digi-Key, Thickness (Max)="0.022\" (0.55mm)"
C4 C6 C17 C20 C24: library part "10µF 0402 X5R 6.3V", "CAP CER 10UF 6.3V 20% X5R 0402", Manufacturer="TDK Corporation", Manufacturer Part Number=C1005X5R0J106M050BC, Operating Temperature="-55°C ~ 125°C", Package / Case="0402 (1005 Metric)", Ratings=-, Supplier Part Number 1=445-8920-2-ND, Temperature Coefficient=X5R, Tolerance=±20%, Voltage - Rated=6.3V, Applications="General Purpose", Capacitance=10µF, Category=Capacitors, ComponentLink1Description=http://product.tdk.com/en/catalog/datasheets/mlcc_commercial_general_en.pdf, ComponentLink1URL=http://product.tdk.com/en/catalog/datasheets/mlcc_commercial_general_en.pdf, Features=-, Height - Seated (Max)=-, Lead Spacing=-, Lead Style=-, Mounting Type="Surface Mount, MLCC", Packaging="Tape & Reel (TR)", Pricing 1=0.07766, RoHS="RoHS Compliant", Size / Dimension="0.039\" L x 0.020\" W (1.00mm x 0.50mm)", Stock 1=47833, Supplier 1=Digi-Key, Thickness (Max)="0.020\" (0.50mm)"
C13 C15: library part "4.7µF 0402 X5R 10V", "CAP CER 4.7UF 10V 10% X5R 0402", Capacitance=4.7µF, Manufacturer="TDK Corporation", Operating Temperature="-55°C ~ 125°C", Package / Case="0402 (1005 Metric)", Ratings=-, Supplier Part Number 1=445-13820-2-ND, Temperature Coefficient=X5R, Tolerance=±10%, Voltage - Rated=10V, Applications="General Purpose", Category=Capacitors, ComponentLink1Description=http://product.tdk.com/en/catalog/datasheets/mlcc_commercial_general_en.pdf, ComponentLink1URL=http://product.tdk.com/en/catalog/datasheets/mlcc_commercial_general_en.pdf, Features=-, Height - Seated (Max)=-, Lead Spacing=-, Lead Style=-, Manufacturer Part Number=C1005X5R1A475K050BC, Mounting Type="Surface Mount, MLCC", Packaging="Tape & Reel (TR)", Pricing 1=0.06265, RoHS="RoHS Compliant", Size / Dimension="0.039\" L x 0.020\" W (1.00mm x 0.50mm)", Stock 1=47833, Supplier 1=Digi-Key, Thickness (Max)="0.022\" (0.55mm)"
C16 C36 C37 C38: library part "1.0µF 0402 X5R 35V", "CAP CER 1UF 35V 10% X5R 0402", Capacitance=1.0µF, Manufacturer="TDK Corporation", Operating Temperature="-55°C ~ 125°C", Package / Case="0402 (1005 Metric)", Ratings=-, Supplier Part Number 1=445-9073-2-ND, Temperature Coefficient=X5R, Tolerance=±10%, Voltage - Rated=35V, Applications="General Purpose", Category=Capacitors, ComponentLink1Description=http://product.tdk.com/en/catalog/datasheets/mlcc_commercial_general_en.pdf, ComponentLink1URL=http://product.tdk.com/en/catalog/datasheets/mlcc_commercial_general_en.pdf, Features=-, Height - Seated (Max)=-, Lead Spacing=-, Lead Style=-, Manufacturer Part Number=C1005X5R1V105K050BC, Mounting Type="Surface Mount, MLCC", Packaging="Tape & Reel (TR)", Pricing 1=0.0186, RoHS="RoHS Compliant", Size / Dimension="0.039\" L x 0.020\" W (1.00mm x 0.50mm)", Stock 1=47833, Supplier 1=Digi-Key, Thickness (Max)="0.022\" (0.55mm)"
C18 C22: library part "10µF 0603 X5R 25V", "CAP CER 10UF 25V 20% X5R 0603", Manufacturer="TDK Corporation", Manufacturer Part Number=C1608X5R1E106M080AC, Operating Temperature="-55°C ~ 125°C", Package / Case="0603 (1608 Metric)", Ratings=-, Supplier Part Number 1=445-9015-2-ND, Temperature Coefficient=X5R, Tolerance=±20%, Voltage - Rated=25V, Applications="General Purpose", Capacitance=10µF, Category=Capacitors, ComponentLink1Description=http://product.tdk.com/en/catalog/datasheets/mlcc_commercial_general_en.pdf, ComponentLink1URL=http://product.tdk.com/en/catalog/datasheets/mlcc_commercial_general_en.pdf, Features=-, Height - Seated (Max)=-, Lead Spacing=-, Lead Style=-, Mounting Type="Surface Mount, MLCC", Packaging="Tape & Reel (TR)", Pricing 1=0.00754, RoHS="RoHS Compliant", Size / Dimension="0.063\" L x 0.031\" W (1.60mm x 0.80mm)", Stock 1=47833, Supplier 1=Digi-Key, Thickness (Max)="0.039\" (1.00mm)"
C19 C23: library part "33pF 0402 C0G, NP0 50V", "CAP CER 33PF 50V 5% NP0 0402", Manufacturer="TDK Corporation", Manufacturer Part Number=C1005C0G1H330J050BA, Operating Temperature="-55°C ~ 125°C", Package / Case="0402 (1005 Metric)", Ratings=-, Supplier Part Number 1=445-1241-2-ND, Temperature Coefficient="C0G, NP0", Tolerance=±5%, Voltage - Rated=50V, Applications="General Purpose", Capacitance=33pF, Category=Capacitors, ComponentLink1Description=http://product.tdk.com/en/catalog/datasheets/mlcc_commercial_general_en.pdf, ComponentLink1URL=http://product.tdk.com/en/catalog/datasheets/mlcc_commercial_general_en.pdf, Features=-, Height - Seated (Max)=-, Lead Spacing=-, Lead Style=-, Mounting Type="Surface Mount, MLCC", Packaging="Tape & Reel (TR)", Pricing 1=0.00274, RoHS="RoHS Compliant", Size / Dimension="0.039\" L x 0.020\" W (1.00mm x 0.50mm)", Stock 1=47833, Supplier 1=Digi-Key, Thickness (Max)="0.022\" (0.55mm)"
C26 C27: library part "10pF 0402 C0G, NP0 50V", "CAP CER 10PF 50V NP0 0402", Manufacturer="TDK Corporation", Manufacturer Part Number=C1005C0G1H100D050BA, Operating Temperature="-55°C ~ 125°C", Package / Case="0402 (1005 Metric)", Ratings=-, Supplier Part Number 1=445-1235-2-ND, Temperature Coefficient="C0G, NP0", Tolerance=±0.5pF, Voltage - Rated=50V, Applications="General Purpose", Capacitance=10pF, Category=Capacitors, ComponentLink1Description=http://product.tdk.com/en/catalog/datasheets/mlcc_commercial_general_en.pdf, ComponentLink1URL=http://product.tdk.com/en/catalog/datasheets/mlcc_commercial_general_en.pdf, Features=-, Height - Seated (Max)=-, Lead Spacing=-, Lead Style=-, Mounting Type="Surface Mount, MLCC", Packaging="Tape & Reel (TR)", Pricing 1=0.00274, RoHS="RoHS Compliant", Size / Dimension="0.039\" L x 0.020\" W (1.00mm x 0.50mm)", Stock 1=47833, Supplier 1=Digi-Key, Thickness (Max)="0.022\" (0.55mm)"
C29: library part "22pF 0402 C0G, NP0 50V", "CAP CER 22PF 50V 5% NP0 0402", Manufacturer="TDK Corporation", Manufacturer Part Number=C1005C0G1H220J050BA, Operating Temperature="-55°C ~ 125°C", Package / Case="0402 (1005 Metric)", Ratings=-, Supplier Part Number 1=445-1239-2-ND, Temperature Coefficient="C0G, NP0", Tolerance=±5%, Voltage - Rated=50V, Applications="General Purpose", Capacitance=22pF, Category=Capacitors, ComponentLink1Description=http://product.tdk.com/en/catalog/datasheets/mlcc_commercial_general_en.pdf, ComponentLink1URL=http://product.tdk.com/en/catalog/datasheets/mlcc_commercial_general_en.pdf, Features=-, Height - Seated (Max)=-, Lead Spacing=-, Lead Style=-, Mounting Type="Surface Mount, MLCC", Packaging="Tape & Reel (TR)", Pricing 1=0.00274, RoHS="RoHS Compliant", Size / Dimension="0.039\" L x 0.020\" W (1.00mm x 0.50mm)", Stock 1=47833, Supplier 1=Digi-Key, Thickness (Max)="0.022\" (0.55mm)"
C30: library part "4.7µF 0402 X5R 10V", "CAP CER 4.7UF 10V 10% X5R 0402", Manufacturer="TDK Corporation", Manufacturer Part Number=C1005X5R1A475K050BC, Operating Temperature="-55°C ~ 125°C", Package / Case="0402 (1005 Metric)", Ratings=-, Supplier Part Number 1=445-13820-2-ND, Temperature Coefficient=X5R, Tolerance=±10%, Voltage - Rated=10V, Applications="General Purpose", Capacitance=4.7µF, Category=Capacitors, ComponentLink1Description=http://product.tdk.com/en/catalog/datasheets/mlcc_commercial_general_en.pdf, ComponentLink1URL=http://product.tdk.com/en/catalog/datasheets/mlcc_commercial_general_en.pdf, Features=-, Height - Seated (Max)=-, Lead Spacing=-, Lead Style=-, Mounting Type="Surface Mount, MLCC", Packaging="Tape & Reel (TR)", Pricing 1=0.06265, RoHS="RoHS Compliant", Size / Dimension="0.039\" L x 0.020\" W (1.00mm x 0.50mm)", Stock 1=47833, Supplier 1=Digi-Key, Thickness (Max)="0.022\" (0.55mm)"
C39 C40 C41 C42 C43 C44 C45 C46 C47 C48 C49 C50 C51 C52: library part "10000pF 0402 X7R 50V", "CAP CER 10000PF 50V 10% X7R 0402", Capacitance=10000pF, Manufacturer="TDK Corporation", Operating Temperature="-55°C ~ 125°C", Package / Case="0402 (1005 Metric)", Ratings=-, Supplier Part Number 1=445-6850-2-ND, Temperature Coefficient=X7R, Tolerance=±10%, Voltage - Rated=50V, Applications="General Purpose", Category=Capacitors, ComponentLink1Description=http://product.tdk.com/en/catalog/datasheets/mlcc_commercial_general_en.pdf, ComponentLink1URL=http://product.tdk.com/en/catalog/datasheets/mlcc_commercial_general_en.pdf, Features=-, Height - Seated (Max)=-, Lead Spacing=-, Lead Style=-, Manufacturer Part Number=C1005X7R1H103K050BB, Mounting Type="Surface Mount, MLCC", Packaging="Tape & Reel (TR)", Pricing 1=0.00685, RoHS="RoHS Compliant", Size / Dimension="0.039\" L x 0.020\" W (1.00mm x 0.50mm)", Stock 1=47833, Supplier 1=Digi-Key, Thickness (Max)="0.022\" (0.55mm)"
D1: "1.6 x 0.8 x 0.55mm (0603) LED 605nm Orange", Colour=Orange, Current - Test=20mA, Luminous Flux @ Current - Test=-, Manufacturer="Rohm Semiconductor", Manufacturer Part Number=SML-D12D8WT86, Millicandela Rating=100mcd, Package / Case="0603 (1608 Metric)", Supplier Part Number 1=511-1577-1-ND, Voltage - Forward (Vf) (Typ)=2.2V, Category=Optoelectronics, ComponentLink1Description=http://rohmfs.rohm.com/en/products/databook/datasheet/opto/led/chip_mono/sml-d1.pdf, ComponentLink1URL=http://rohmfs.rohm.com/en/products/databook/datasheet/opto/led/chip_mono/sml-d1.pdf, Height=0.55mm, Lens Style/Size="Rectangle with Flat Top, 1.2mm x 0.8mm", Lens Type="Diffused, White", Mounting Type="Surface Mount", Packaging="Cut Tape (CT)", Pricing 1="1=0.38, 10=0.279, 25=0.2232, 100=0.1478, 250=0.1046, 500=0.08926, 1000=0.06974 (GBP)", RoHS="RoHS Compliant", Size / Dimension="1.60mm L x 0.80mm W", Stock 1=1719, Supplier 1=Digi-Key, Viewing Angle=-, Wavelength - Dominant=605nm, Wavelength - Peak=-
D2: library part SML-D12P, "1.6 x 0.8 x 0.55mm (0603) LED 560nm Green", Colour=Green, Current - Test=20mA, Luminous Flux @ Current - Test=-, Manufacturer="Rohm Semiconductor", Manufacturer Part Number=SML-D12P8WT86, Millicandela Rating=6.3mcd, Package / Case="0603 (1608 Metric)", Supplier Part Number 1=511-1579-1-ND, Voltage - Forward (Vf) (Typ)=2.2V, Category=Optoelectronics, ComponentLink1Description=http://rohmfs.rohm.com/en/products/databook/datasheet/opto/led/chip_mono/sml-d1.pdf, ComponentLink1URL=http://rohmfs.rohm.com/en/products/databook/datasheet/opto/led/chip_mono/sml-d1.pdf, Height=0.55mm, Lens Style/Size="Rectangle with Flat Top, 1.2mm x 0.8mm", Lens Type="Diffused, White", Mounting Type="Surface Mount", Packaging="Cut Tape (CT)", Pricing 1="1=0.38, 10=0.279, 25=0.2232, 100=0.1478, 250=0.1046, 500=0.08926, 1000=0.06974 (GBP)", RoHS="RoHS Compliant", Size / Dimension="1.60mm L x 0.80mm W", Stock 1=19305, Supplier 1=Digi-Key, Viewing Angle=-, Wavelength - Dominant=560nm, Wavelength - Peak=-
D3 D4: "LED Uni-Color White 2-Pin Chip LED T/R", Case/Package=0603, Case Code (Metric)=1608, Colour=White,Yellow, Correlated Colour Temperature (CCT)=x=0.294/y=0.286, Forward Current=20mA, Forward Voltage=3.15V, Illumination Colour=White, Lens Colour=Clear, Manufacturer="Vishay Lite-On", Max Operating Temperature=80°C, Min Operating Temperature=-20°C, Package Quantity=1, Power Dissipation=70mW, Reverse Voltage=5V, Supplier Part Number 1=160-1724-1-ND, Test Current=5mA, Case Code (Imperial)=0603, ComponentLink1Description=https://datasheet.ciiva.com/11774/0900766b80e28fab-11774237.pdf, ComponentLink1URL=https://datasheet.ciiva.com/11774/0900766b80e28fab-11774237.pdf, ComponentLink2Description=https://datasheet.ciiva.com/25775/ltw-c191ts5-25775221.pdf, ComponentLink2URL=https://datasheet.ciiva.com/25775/ltw-c191ts5-25775221.pdf, ComponentLink3Description=https://datasheet.ciiva.com/15117/getdatasheetpartid-145287-15117825.pdf, ComponentLink3URL=https://datasheet.ciiva.com/15117/getdatasheetpartid-145287-15117825.pdf, ComponentLink4Description=https://datasheet.ciiva.com/12403/lite-on-ltw-c191ts5-190110-12403904.pdf, ComponentLink4URL=https://datasheet.ciiva.com/12403/lite-on-ltw-c191ts5-190110-12403904.pdf, ComponentLink5Description=https://datasheet.ciiva.com/26913/ltw-c191ts5-26913715.pdf, ComponentLink5URL=https://datasheet.ciiva.com/26913/ltw-c191ts5-26913715.pdf, ComponentLink6Description=https://datasheet.ciiva.com/16388/ltw-c191ts5-16388573.pdf, ComponentLink6URL=https://datasheet.ciiva.com/16388/ltw-c191ts5-16388573.pdf, ComponentLink7Description=https://datasheet.ciiva.com/2111/s-110-ltw-c191ts5-2111264.pdf, ComponentLink7URL=https://datasheet.ciiva.com/2111/s-110-ltw-c191ts5-2111264.pdf, Depth=0.8mm, Height=0.55mm, Lead Free="Lead Free", Length=1.6mm, Lens Style=Diffused,Colored,Rectangular,Tinted, Luminous Intensity=112mcd, Manufacturer Part Number=LTW-C191TS5, Mount="Surface Mount", Number of elements=1, Number of LEDs=1, Number of Pins=2, Packaging="Tape and Reel", Power Rating=70mW, Pricing 1="1=0.51, 10=0.396, 25=0.33, 100=0.2843, 250=0.2538, 500=0.2183, 1000=0.1685, 2500=0.1523 (USD)", Radiation Hardening=No, Stock 1=149804, Supplier 1=Digi-Key, Viewing Angle=130°, Width=0.8mm
J1: "USB micro B with no TH anchors", Current Rating="1.8A per Contact", Insulation Color=Black, Manufacturer="Amphenol FCI", Manufacturer Part Number=10118192-0001LF, Material Flammability Rating="UL94 V-0", Operating Temperature="-30°C ~ 80°C", Voltage - Rated=100VAC, Category="Connectors, Interconnects", ComponentLink1Description="FCI drawing", ComponentLink1URL=http://portal.fciconnect.com/Comergent//fci/drawing/10118192.pdf, ComponentLink2Description="FCI datasheet", ComponentLink2URL=https://cdn.amphenol-icc.com/media/wysiwyg/files/documentation/datasheet/inputoutput/io_usb_micro.pdf, Connector Type="USB - micro B", Contact Finish=Gold, Created By=HUGHWI, Features="Solder Retention", Gender=Receptacle, Ingress Protection=-, Mating Cycles=10000, Mounting Feature=Horizontal, Mounting Type="Surface Mount, Right Angle; Through Hole", Number of Contacts=5, Number of Ports=1, Packaging="Cut Tape (CT)", Part Status=Active, RoHS="RoHS Compliant", Shell/Shielding Material="Steel, Stainless", Shielding=Shielded, Specifications="USB 2.0", Stock 1=156476, Supplier 2=Digi-Key, Supplier 3=Farnell, Supplier 4=Mouser, Supplier 5=RSComponents, Supplier Part Number 2=609-4613-1-ND, Supplier Part Number 3=2506568, Supplier Part Number 4=649-10118192-0001LF, Supplier Part Number 5=863-2986, Termination=Solder
J2 J3 J4: "Conn Shrouded Header HDR 2 POS 1mm Solder RA SMD T/R", Color=Natural, Contact Resistance=40mR, Current Rating=700mA, Flammability Rating="UL94 V-0", Housing Color=Beige, Insulation Resistance=100MR, Manufacturer=JST, Max Current Rating=1A, Max Operating Temperature=85°C, Max Voltage Rating (AC)=50V, Min Operating Temperature=-25°C, Supplier Part Number 1=1679117, ComponentLink1Description=https://datasheet.ciiva.com/26924/getdatasheetpartid-640850-26924055.pdf?src-supplier=Verical, ComponentLink1URL=https://datasheet.ciiva.com/26924/getdatasheetpartid-640850-26924055.pdf?src-supplier=Verical, ComponentLink2Description=https://datasheet.ciiva.com/712/esr-712467.pdf?src-supplier=Digi-Key, ComponentLink2URL=https://datasheet.ciiva.com/712/esr-712467.pdf?src-supplier=Digi-Key, ComponentLink3Description=https://datasheet.ciiva.com/712/esr-712468.pdf?src-supplier=Digi-Key, ComponentLink3URL=https://datasheet.ciiva.com/712/esr-712468.pdf?src-supplier=Digi-Key, ComponentLink4Description=https://datasheet.ciiva.com/730/esr-730600.pdf?src-supplier=Digi-Key, ComponentLink4URL=https://datasheet.ciiva.com/730/esr-730600.pdf?src-supplier=Digi-Key, ComponentLink5Description=https://datasheet.ciiva.com/8052/91630-8052284.pdf?src-supplier=Element14, ComponentLink5URL=https://datasheet.ciiva.com/8052/91630-8052284.pdf?src-supplier=Element14, ComponentLink6Description=https://datasheet.ciiva.com/16391/sm02b-srss-tblfsn-16391308.pdf?src-supplier=Future+Electronics, ComponentLink6URL=https://datasheet.ciiva.com/16391/sm02b-srss-tblfsn-16391308.pdf?src-supplier=Future+Electronics, Connector Type="Header,Male Pin", Contact Material="Copper Alloy,Copper", Contact Plating=Tin,Copper,Lead, Contact Shape=Square, Depth=4.95mm, Fastening Type=Push,Pull, Housing Material=Polyamide, Insulation Color=Natural, Insulation Material=Nylon, Lead Free="Lead Free", Lead Pitch=1mm, Length=4mm, Manufacturer Part Number=SM02B-SRSS-TB(LF)(SN), Material=Polyamide, Mount="Surface Mount", Number of Contacts=2, Number of Positions=2, Number of Rows=1, Orientation="Right Angle", Packaging="Tape and Reel", Pitch=1mm, Pricing 1="100=0.24600, 500=0.21400, 1000=0.17700, 2500=0.15600, 5000=0.13600, 10000=0.13000 (GBP)", REACH SVHC="No SVHC", RoHS=Yes, Stock 1=47603, Supplier 1=Farnell, Termination=Solder, Voltage Rating=50V, Voltage Rating (AC)=50V
L1 L4: library part NR3015T2R2M, "FIXED IND 2.2UH 1.5A 72 MOHM SMD", Current - Saturation=1.48A, Current Rating=1.5A, DC Resistance (DCR)="72 mOhm Max", Frequency - Self Resonant=64MHz, Frequency - Test=100kHz, Manufacturer="Taiyo Yuden", Operating Temperature="-25°C ~ 120°C", Package / Case=Nonstandard, Q @ Freq=-, Supplier Part Number 1=587-1648-1-ND, Tolerance=±20%, Category="Inductors, Coils, Chokes", ComponentLink1Description=http://ds.yuden.co.jp/TYCOMPAS/ut/detail.do?productNo=NR3015T2R2M&fileName=NR3015T2R2M_SS&mode=specSheetDownload, ComponentLink1URL=http://ds.yuden.co.jp/TYCOMPAS/ut/detail.do?productNo=NR3015T2R2M&fileName=NR3015T2R2M_SS&mode=specSheetDownload, Height - Seated (Max)="0.059\" (1.50mm)", Inductance=2.2µH, Manufacturer Part Number=NR3015T2R2M, Material - Core=Ferrite, Mounting Type="Surface Mount", Packaging="Cut Tape (CT)", Pricing 1="1=0.23, 10=0.209, 25=0.1864, 50=0.163, 100=0.1513, 250=0.13964, 500=0.13268, 1000=0.10707 (GBP)", Ratings=-, RoHS="RoHS Compliant", Shielding=Shielded, Size / Dimension="0.118\" L x 0.118\" W (3.00mm x 3.00mm)", Stock 1=150589, Supplier 1=Digi-Key, Type=Wirewound
L2 L3: library part BLM15PD121SN1D, "FERRITE BEAD 120 OHM 0402 1LN", Current Rating (Max)=1.3A, DC Resistance (DCR) (Max)="90 mOhm", Impedance @ Frequency="120 Ohm @ 100MHz", Manufacturer="Murata Electronics North America", Operating Temperature="-55°C ~ 125°C", Package / Case="0402 (1005 Metric)", Ratings=-, Supplier Part Number 1=490-5203-2-ND, Category=Filters, ComponentLink1Description=http://search.murata.co.jp/Ceramy/image/img/PDF/ENG/L0110S0100BLM15PG~BLM15PD.pdf, ComponentLink1URL=http://search.murata.co.jp/Ceramy/image/img/PDF/ENG/L0110S0100BLM15PG~BLM15PD.pdf, Filter Type="Power Line", Height (Max)="0.022\" (0.55mm)", Manufacturer Part Number=BLM15PD121SN1D, Mounting Type="Surface Mount", Number of Lines=1, Packaging="Tape & Reel (TR)", Pricing 1="10000=0.01677, 20000=0.01557, 30000=0.0154, 50000=0.01498 (GBP)", RoHS="RoHS Compliant", Size / Dimension="0.039\" L x 0.020\" W (1.00mm x 0.50mm)", Stock 1=50000, Supplier 1=Digi-Key
L5 L6 L7 L8 L9 L10 L11: "Murata", Case/Package=0402, Case Code (Metric)=1005, Current Rating=1A, DC Resistance (DCR)=200mR, Max Operating Temperature=125°C, Min Operating Temperature=-55°C, Package Quantity=1, Supplier Part Number 1=490-10662-1-ND, Test Frequency=100MHz, Tolerance=25%, Case Code (Imperial)=0402, ComponentLink1Description=https://datasheet.ciiva.com/41449/001172215-da-01-en-drossel-0402-470r-1-0x0-5mm-10000st-41449502.pdf?src-supplier=Conrad, ComponentLink1URL=https://datasheet.ciiva.com/41449/001172215-da-01-en-drossel-0402-470r-1-0x0-5mm-10000st-41449502.pdf?src-supplier=Conrad, ComponentLink2Description=https://datasheet.ciiva.com/29364/l0110e-29364075.pdf?src-supplier=Digi-Key, ComponentLink2URL=https://datasheet.ciiva.com/29364/l0110e-29364075.pdf?src-supplier=Digi-Key, Height=0.5mm, Impedance=470R, Lead Free="Lead Free", Length=1mm, Manufacturer=Murata, Manufacturer Part Number=BLM15PX471SN1D, Material=Steel, Max Current Rating=1A, Max DC Current=1A, Number of Circuits=1, Number of Lines=1, Number of Pins=2, Packaging="Tape and Reel", Pricing 1="1=0.15000, 10=0.12300, 25=0.09560, 50=0.07920, 100=0.06820, 250=0.05456, 500=0.04910, 1000=0.04092, 5000=0.03819 (USD)", RoHS=Yes, Stock 1=97005, Supplier 1=Digi-Key, Termination=SMD/SMT, Width=0.5mm
M1: library part "AES-MS-MT3620-M-G (SAT)"
Q1 Q2 Q3: "MOSFET N-CH 50V 220MA SOT-23", Manufacturer=Micross, Supplier Part Number 1=BSS138-DIE-ND, Manufacturer Part Number=BSS138, Pricing 1="25 = 4.00000 (USD)", Stock 1=0, Supplier 1=Digi-Key
R1 R2 R35: "RES 100K OHM 1/10W 1% 0402 SMD", Manufacturer="Panasonic Electronic Components", Manufacturer Part Number=ERJ-2RKF1003X, Package / Case="0402 (1005 Metric)", Power (Watts)="0.1W, 1/10W", Supplier Device Package=0402, Supplier Part Number 1=P100KLCT-ND, Temperature Coefficient=±100ppm/°C, Tolerance=±1%, Category=Resistors, ComponentLink1Description=http://industrial.panasonic.com/www-cgi/jvcr13pz.cgi?E+PZ+3+AOA0002+ERJ2RKF1003X+7+WW, ComponentLink1URL=http://industrial.panasonic.com/www-cgi/jvcr13pz.cgi?E+PZ+3+AOA0002+ERJ2RKF1003X+7+WW, Composition="Thick Film", Features=-, Height="0.016\" (0.40mm)", Number of Terminations=2, Packaging="Cut Tape (CT)", Pricing 1="1=0.07, 50=0.0128, 100=0.0097, 250=0.0072, 500=0.00532, 1000=0.00355, 5000=0.0025 (GBP)", Resistance (Ohms)=100K, RoHS="RoHS Compliant", Size / Dimension="0.039\" L x 0.020\" W (1.00mm x 0.50mm)", Stock 1=2310913, Supplier 1=Digi-Key
R3: library part THREE-WAY-0R-0402-NO-SHORT, "RES SMD 0.0OHM JUMPER 1/10W 0402", Manufacturer="Panasonic Electronic Components", Manufacturer Part Number=ERJ-2GE0R00X, Operating Temperature="-55°C ~ 155°C", Package / Case="0402 (1005 Metric)", Power (Watts)="0.1W, 1/10W", Resistance (Ohms)=0.0, Supplier Device Package=0402, Supplier Part Number 1=P0.0JCT-ND, Temperature Coefficient=-, Tolerance=Jumper, Category=Resistors, ComponentLink1Description=http://industrial.panasonic.com/www-cgi/jvcr13pz.cgi?E+PZ+3+AOA0001+ERJ2GE0R00X+7+WW, ComponentLink1URL=http://industrial.panasonic.com/www-cgi/jvcr13pz.cgi?E+PZ+3+AOA0001+ERJ2GE0R00X+7+WW, Composition="Thick Film", Failure Rate=-, Features="Automotive AEC-Q200", Height="0.016\" (0.40mm)", Number of Terminations=2, Packaging="Cut Tape (CT)", Part Status=Active, Pricing 1="1=0.08, 50=0.0104, 100=0.0079, 250=0.00588, 500=0.00436, 1000=0.0029, 5000=0.00204 (GBP)", RoHS="RoHS Compliant", Size / Dimension="0.039\" L x 0.020\" W (1.00mm x 0.50mm)", Stock 1=3259868, Supplier 1=Digi-Key
R4 R22: "RES 150K OHM 1/10W 1% 0402 SMD", Manufacturer="Panasonic Electronic Components", Manufacturer Part Number=ERJ-2RKF1503X, Package / Case="0402 (1005 Metric)", Power (Watts)="0.1W, 1/10W", Supplier Device Package=0402, Supplier Part Number 1=P150KLCT-ND, Temperature Coefficient=±100ppm/°C, Tolerance=±1%, Category=Resistors, ComponentLink1Description=http://industrial.panasonic.com/www-cgi/jvcr13pz.cgi?E+PZ+3+AOA0002+ERJ2RKF1503X+7+WW, ComponentLink1URL=http://industrial.panasonic.com/www-cgi/jvcr13pz.cgi?E+PZ+3+AOA0002+ERJ2RKF1503X+7+WW, Composition="Thick Film", Features=-, Height="0.016\" (0.40mm)", Number of Terminations=2, Packaging="Cut Tape (CT)", Pricing 1="1=0.07, 50=0.0128, 100=0.0097, 250=0.0072, 500=0.00532, 1000=0.00355, 5000=0.0025 (GBP)", Resistance (Ohms)=150K, RoHS="RoHS Compliant", Size / Dimension="0.039\" L x 0.020\" W (1.00mm x 0.50mm)", Stock 1=330002, Supplier 1=Digi-Key
R5 R23: "RES 33.2K OHM 1/10W 1% 0402 SMD", Manufacturer="Panasonic Electronic Components", Manufacturer Part Number=ERJ-2RKF3322X, Package / Case="0402 (1005 Metric)", Power (Watts)="0.1W, 1/10W", Supplier Device Package=0402, Supplier Part Number 1=P33.2KLCT-ND, Temperature Coefficient=±100ppm/°C, Tolerance=±1%, Category=Resistors, ComponentLink1Description=http://industrial.panasonic.com/www-cgi/jvcr13pz.cgi?E+PZ+3+AOA0002+ERJ2RKF3322X+7+WW, ComponentLink1URL=http://industrial.panasonic.com/www-cgi/jvcr13pz.cgi?E+PZ+3+AOA0002+ERJ2RKF3322X+7+WW, Composition="Thick Film", Features=-, Height="0.016\" (0.40mm)", Number of Terminations=2, Packaging="Cut Tape (CT)", Pricing 1="1=0.07, 50=0.0128, 100=0.0097, 250=0.0072, 500=0.00532, 1000=0.00355, 5000=0.0025 (GBP)", Resistance (Ohms)=33.2K, RoHS="RoHS Compliant", Size / Dimension="0.039\" L x 0.020\" W (1.00mm x 0.50mm)", Stock 1=313628, Supplier 1=Digi-Key
R6 R20 R21 R24: library part 4.7K, "RES 4.7K OHM 1/10W 1% 0402 SMD", Manufacturer="Panasonic Electronic Components", Manufacturer Part Number=ERJ-2RKF4701X, Package / Case="0402 (1005 Metric)", Power (Watts)="0.1W, 1/10W", Supplier Device Package=0402, Supplier Part Number 1=P4.70KLCT-ND, Temperature Coefficient=±100ppm/°C, Tolerance=±1%, Category=Resistors, ComponentLink1Description=http://industrial.panasonic.com/www-cgi/jvcr13pz.cgi?E+PZ+3+AOA0002+ERJ2RKF4701X+7+WW, ComponentLink1URL=http://industrial.panasonic.com/www-cgi/jvcr13pz.cgi?E+PZ+3+AOA0002+ERJ2RKF4701X+7+WW, Composition="Thick Film", Features=-, Height="0.016\" (0.40mm)", Number of Terminations=2, Packaging="Cut Tape (CT)", Pricing 1="1=0.07, 50=0.0128, 100=0.0097, 250=0.0072, 500=0.00532, 1000=0.00355, 5000=0.0025 (GBP)", Resistance (Ohms)=4K7, RoHS="RoHS Compliant", Size / Dimension="0.039\" L x 0.020\" W (1.00mm x 0.50mm)", Stock 1=1251398, Supplier 1=Digi-Key
R7 R11 R12 R13 R36 R37: "RES 10K OHM 1/10W 1% 0402 SMD", Manufacturer="Panasonic Electronic Components", Manufacturer Part Number=ERJ-2RKF1002X, Package / Case="0402 (1005 Metric)", Power (Watts)="0.1W, 1/10W", Supplier Device Package=0402, Supplier Part Number 1=P10.0KLCT-ND, Temperature Coefficient=±100ppm/°C, Tolerance=±1%, Category=Resistors, ComponentLink1Description=http://industrial.panasonic.com/www-cgi/jvcr13pz.cgi?E+PZ+3+AOA0002+ERJ2RKF1002X+7+WW, ComponentLink1URL=http://industrial.panasonic.com/www-cgi/jvcr13pz.cgi?E+PZ+3+AOA0002+ERJ2RKF1002X+7+WW, Composition="Thick Film", Features=-, Height="0.016\" (0.40mm)", Number of Terminations=2, Packaging="Cut Tape (CT)", Pricing 1="1=0.07, 50=0.0128, 100=0.0097, 250=0.0072, 500=0.00532, 1000=0.00355, 5000=0.0025 (GBP)", Resistance (Ohms)=10K, RoHS="RoHS Compliant", Size / Dimension="0.039\" L x 0.020\" W (1.00mm x 0.50mm)", Stock 1=4805447, Supplier 1=Digi-Key
R8: "RES 12K OHM 1/10W 1% 0402 SMD", Manufacturer="Panasonic Electronic Components", Manufacturer Part Number=ERJ-2RKF1202X, Package / Case="0402 (1005 Metric)", Power (Watts)="0.1W, 1/10W", Supplier Device Package=0402, Supplier Part Number 1=P12.0KLCT-ND, Temperature Coefficient=±100ppm/°C, Tolerance=±1%, Category=Resistors, ComponentLink1Description=http://industrial.panasonic.com/www-cgi/jvcr13pz.cgi?E+PZ+3+AOA0002+ERJ2RKF1202X+7+WW, ComponentLink1URL=http://industrial.panasonic.com/www-cgi/jvcr13pz.cgi?E+PZ+3+AOA0002+ERJ2RKF1202X+7+WW, Composition="Thick Film", Features=-, Height="0.016\" (0.40mm)", Number of Terminations=2, Packaging="Cut Tape (CT)", Pricing 1="1=0.07, 50=0.0128, 100=0.0097, 250=0.0072, 500=0.00532, 1000=0.00355, 5000=0.0025 (GBP)", Resistance (Ohms)=12K, RoHS="RoHS Compliant", Size / Dimension="0.039\" L x 0.020\" W (1.00mm x 0.50mm)", Stock 1=165467, Supplier 1=Digi-Key